# EAGLE board ProMicro Keyer - V1_1 (EAGLE 9.5.2)
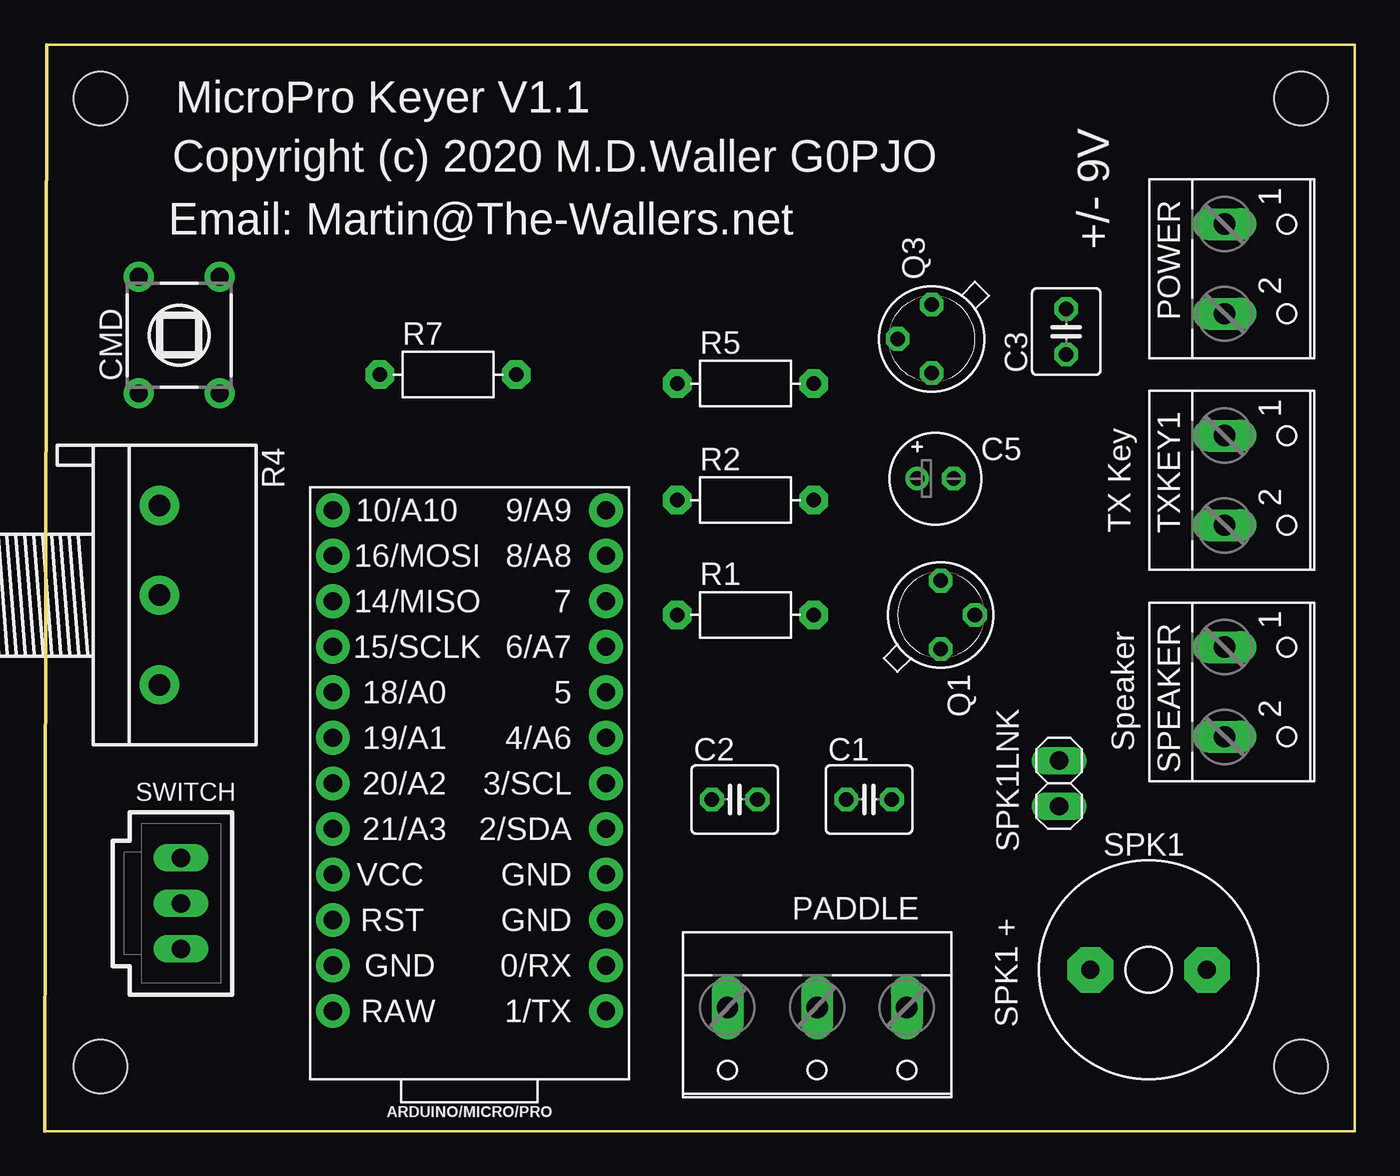
[diagram p0: board, top side]
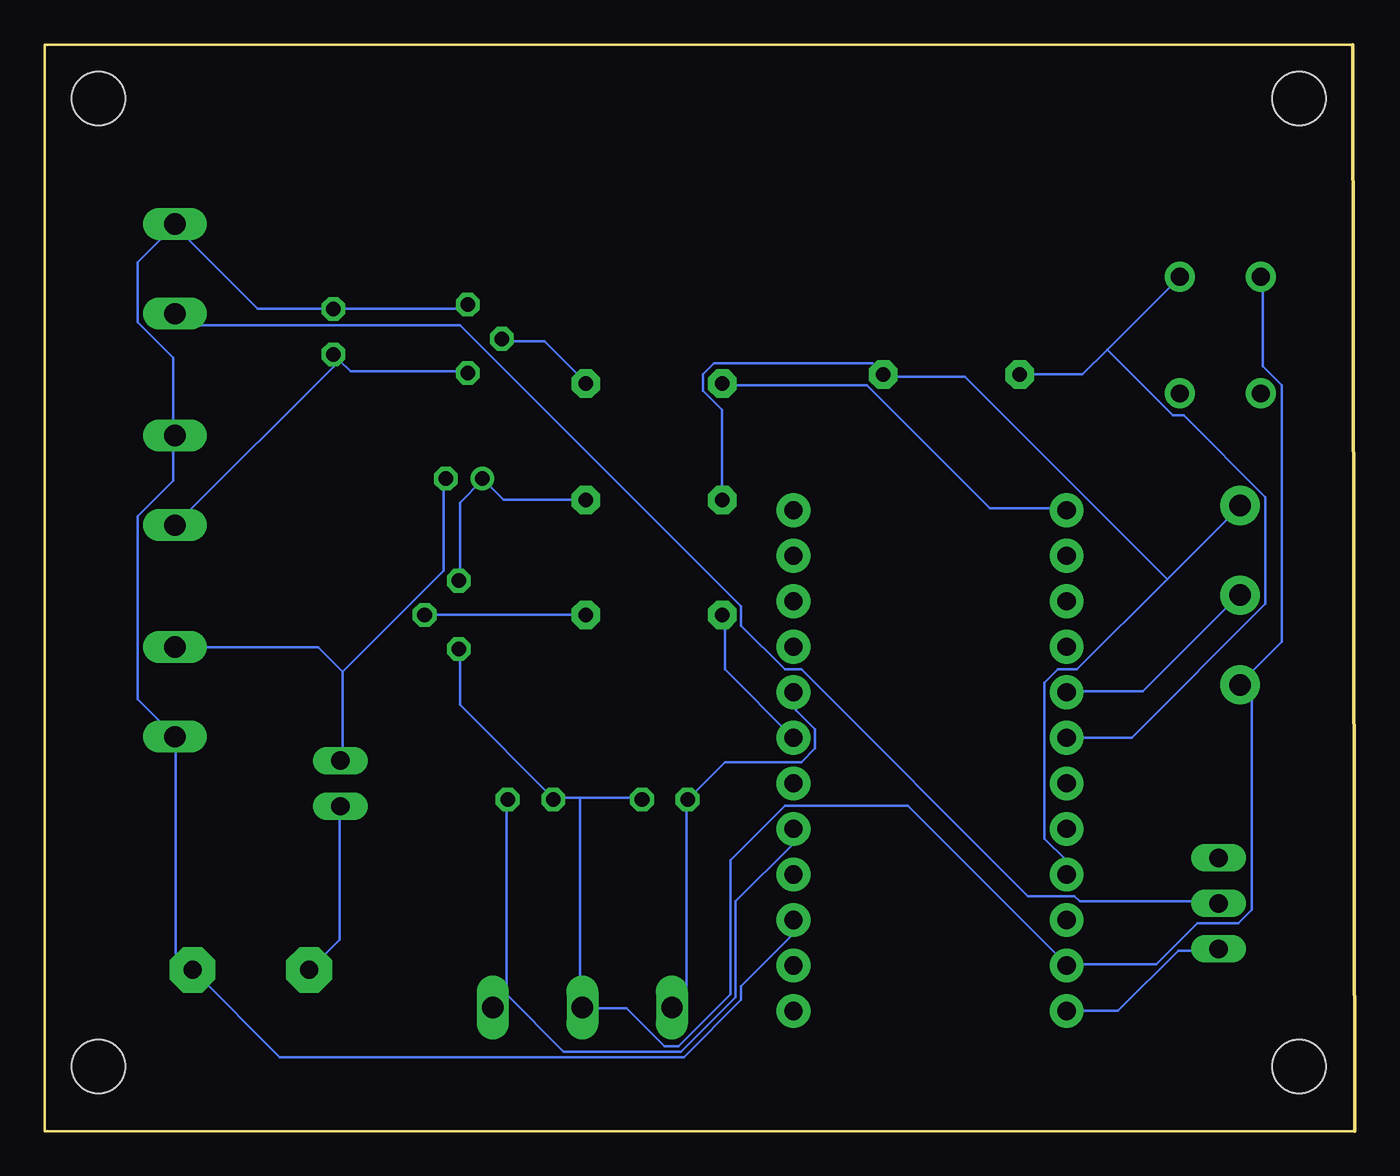
[diagram p1: board, bottom side, seen from below]

Size 73.1 x 60.6 mm. Coordinates in mm from the lower left corner, seen from the top.
Outline: 0.1,60.6 0,0 73.1,0 73.1,60.6 0.1,60.6
Copper layers (1*16): Top 0.035mm / dielectric 1.5mm / Bottom 0.035mm
Design rules "default": minimum track width 6mil, minimum drill 0.35mm, track to track 6mil, track to pad 6mil, pad to pad 6mil, via to via 6mil, smd to smd 6mil, copper to edge 40mil, drill to drill 6mil, minimum pad ring 10mil, minimum via ring 8mil, stop-mask expansion 4mil, vias tented up to drill 0mil, thermal gap 10mil
Holes 3 mm at 3.1,3.6 70.1,3.6 70.1,57.6 3.1,57.6

## Footprints (pad centres in the part's own frame; a part is rotated, then mirrored left to right if it is on the bottom)
SPARKFUN_PRO_MICRO = drill 1.016 pad 1.88: 1 -7.62,12.7; 2 -7.62,10.16; 3 -7.62,7.62; 4 -7.62,5.08; 5 -7.62,2.54; 6 -7.62,0; 7 -7.62,-2.54; 8 -7.62,-5.08; 9 -7.62,-7.62; 10 -7.62,-10.16; 11 -7.62,-12.7; 12 -7.62,-15.24; 13 7.62,-15.24; 14 7.62,-12.7; 15 7.62,-10.16; 16 7.62,-7.62; 17 7.62,-5.08; 18 7.62,-2.54; 19 7.62,0; 20 7.62,2.54; 21 7.62,5.08; 22 7.62,7.62; 23 7.62,10.16; VCC 7.62,12.7
C025-040X050 = drill 0.813 octagon: 1 -1.27,0; 2 1.27,0
E2-5 = drill 0.813 pad 1.27: + -1.016,0 | drill 0.813 pad 1.27 octagon: - 1.016,0
TL1105T = drill 1 pad 1.676: 1 -2.25,3.25; 2 2.25,3.25; 3 -2.25,-3.25; 4 2.25,-3.25
W237-103 = drill 1.194 long: 1 -5,-1.29; 2 0,-1.29; 3 5,-1.29
W237-102 = drill 1.194 long: 1 -2.5,-1.27; 2 2.5,-1.27
TO18- = drill 0.813 octagon: 1 1.905,0; 2 0,1.905; 3 -1.905,0
R-7,5 = drill 0.813 pad 1.6 octagon: 1 -3.81,0; 2 3.81,0
3RP/1610N = drill 1.2 pad 2.184: 1 -5,0; 2 0,0; 3 5,0
AL60P = drill 1.016 pad 2.54 octagon: 1 -3.251,0; 2 3.251,0
1X02 = drill 1.016 long: 1 -1.27,0; 2 1.27,0
70543-03 = drill 1.016 long: 1 -2.54,0; 2 0,0; 3 2.54,0

## Placement (x,y rotation side)
ARDUINO/MICRO/PRO  [SPARKFUN_PRO_MICRO]  23.7,19.4 180 top
C1  0.01  [C025-040X050]  46,18.5 0 top
C2  0.01  [C025-040X050]  38.5,18.5 0 top
C3  0.01  [C025-040X050]  57,44.6 90 top
C5  100  [E2-5]  49.7,36.4 0 top
CMD  [TL1105T]  7.5,44.4 0 top
PADDLE  PADDLE  [W237-103]  43.1,5.6 180 top
POWER  [W237-102]  67.1,48.1 270 top
Q1  2N2222  [TO18-]  50,28.8 270 top
Q3  2N2222  [TO18-]  49.5,44.2 90 top
R1  1K  [R-7,5]  39.1,28.8 0 top
R2  1K  [R-7,5]  39.1,35.2 0 top
R4  10K  [3RP/1610N]  6.4,29.9 270 top
R5  1K  [R-7,5]  39.1,41.7 0 top
R7  10K  [R-7,5]  22.5,42.2 0 top
SPEAKER  [W237-102]  67.1,24.5 270 top
SPK1  [AL60P]  61.6,9 0 top
SPK1LNK  [1X02]  56.6,19.4 90 top
SWITCH  [70543-03]  7.6,12.7 270 top
TXKEY1  [W237-102]  67.1,36.3 270 top

## Library data of the parts
ARDUINO/MICRO/PRO = ArduinoLibrary
C1-C3 = ref-packages
C5 = rcl
CMD = switch
PADDLE POWER SPEAKER TXKEY1 = con-wago-500
Q1 Q3 = transistor
R1 R2 R5 R7 = discrete
R4 = pot
SPK1 = buzzer
SPK1LNK = pinhead
SWITCH = con-molex

## Nets
S$1: C5.- SPEAKER.1 SPK1LNK.2
S$3: ARDUINO/MICRO/PRO.11
S$5: ARDUINO/MICRO/PRO.VCC SWITCH.3
S$6: ARDUINO/MICRO/PRO.3 C3.2 POWER.1 Q3.1 SPEAKER.2 SPK1.2 TXKEY1.1
S$7: ARDUINO/MICRO/PRO.17 R4.2
S$9: C5.+ Q1.3 R2.2
S$10: ARDUINO/MICRO/PRO.18 CMD.2 R7.1
S$12: ARDUINO/MICRO/PRO.23 C1.1 C2.2 CMD.1 PADDLE.2 Q1.1 R4.3
S$14: Q1.2 R1.2
S$15: ARDUINO/MICRO/PRO.7 R1.1
S$16: ARDUINO/MICRO/PRO.12
S$17: ARDUINO/MICRO/PRO.21 R2.1 R4.1 R7.2
S$18: ARDUINO/MICRO/PRO.5 C1.2 PADDLE.1
S$19: Q3.2 R5.2
S$20: ARDUINO/MICRO/PRO.13 R5.1
S$21: C3.1 Q3.3 TXKEY1.2
S$23: ARDUINO/MICRO/PRO.2
S$24: ARDUINO/MICRO/PRO.1
S$25: SPK1.1 SPK1LNK.1
S$26: ARDUINO/MICRO/PRO.8 C2.1 PADDLE.3
S$27: POWER.2 SWITCH.2

## Tracks (layer width: path | path; a pad name or v marks a point on that pad's centre or on a via)
S$1
  Bottom 0.152: 56.49,25.61 50.85,31.25 50.85,36.28 C5.- | 56.49,25.61 56.49,20.74 SPK1LNK.2 | 56.49,25.61 57.86,26.98 65.78,26.98 SPEAKER.1
S$5
  Bottom 0.152: SWITCH.3 7.72,10.07 9.85,10.07 13.21,6.71 15.95,6.71 ARDUINO/MICRO/PRO.VCC
S$6
  Bottom 0.152: Q3.1 49.63,46.03 49.78,45.88 56.95,45.88 C3.2 57.1,45.88 61.21,45.88 65.78,50.45 POWER.1 65.94,50.45 67.92,48.47 67.92,45.12 65.94,43.14 65.94,38.87 TXKEY1.1 65.94,38.72 65.94,36.28 67.92,34.3 67.92,24.09 65.94,22.11 SPEAKER.2 65.78,21.96 65.78,9.92 64.87,9 SPK1.2 64.72,8.85 59.99,4.12 37.44,4.12 34.24,7.32 34.24,8.09 31.34,10.98 31.34,11.74 ARDUINO/MICRO/PRO.3
S$7
  Bottom 0.152: ARDUINO/MICRO/PRO.17 15.95,24.55 11.83,24.55 6.5,29.88 R4.2
S$9
  Bottom 0.152: Q1.3 49.94,30.79 49.94,35.06 48.72,36.28 C5.+ 48.56,36.28 47.5,35.21 42.92,35.21 R2.2
S$10
  Bottom 0.152: 13.82,43.6 9.85,47.56 CMD.2 | 13.82,43.6 15.19,42.22 18.54,42.22 R7.1 | 13.82,43.6 10.16,39.94 9.55,39.94 4.98,35.37 4.98,29.42 12.44,21.96 15.95,21.96 ARDUINO/MICRO/PRO.18
S$12
  Bottom 0.152: 43.23,18.6 44.6,18.6 C1.1 44.75,18.6 49.94,23.78 49.94,26.83 Q1.1 | 43.23,18.6 39.88,18.6 C2.2 | 43.23,18.6 43.23,7.02 PADDLE.2 43.08,6.87 40.64,6.87 38.51,4.73 37.74,4.73 34.85,7.63 34.85,15.1 31.8,18.14 24.94,18.14 16.1,9.31 ARDUINO/MICRO/PRO.23 15.95,9.31 11.07,9.31 8.79,11.59 6.5,11.59 5.74,12.35 5.74,24.24 6.35,24.85 R4.3 6.35,25 4.06,27.29 4.06,41.61 5.13,42.68 5.13,47.56 CMD.1
S$14
  Bottom 0.152: Q1.2 51.76,28.81 42.92,28.81 R1.2
S$15
  Bottom 0.152: R1.1 35.15,28.66 35.15,25.77 31.34,21.96 ARDUINO/MICRO/PRO.7
S$17
  Bottom 0.152: R2.1 35.3,35.21 35.3,40.24 36.37,41.31 36.37,42.22 35.76,42.83 26.92,42.83 26.31,42.22 R7.2 26.16,42.07 21.74,42.07 10.46,30.79 | 10.46,30.79 6.5,34.76 R4.1 | 10.46,30.79 15.49,25.77 16.56,25.77 17.32,25 17.32,16.32 16.1,15.1 16.1,14.33 ARDUINO/MICRO/PRO.21
S$18
  Bottom 0.152: 47.34,7.63 47.34,18.45 C1.2 | 47.34,7.63 47.95,7.02 PADDLE.1 47.34,7.63 | 47.34,7.63 44.14,4.43 37.59,4.43 34.54,7.48 34.54,12.81 31.34,16.01 31.34,16.77 ARDUINO/MICRO/PRO.5
S$19
  Bottom 0.152: Q3.2 47.5,44.05 45.21,44.05 42.92,41.77 R5.2
S$20
  Bottom 0.152: R5.1 35.15,41.61 27.23,41.61 20.37,34.76 16.1,34.76 ARDUINO/MICRO/PRO.13
S$21
  Bottom 0.152: 56.64,42.99 56.95,43.29 C3.1 56.64,42.99 | 56.64,42.99 56.03,42.38 49.63,42.38 Q3.3 | 56.64,42.99 65.78,33.84 TXKEY1.2
S$25
  Bottom 0.152: SPK1LNK.1 56.64,17.99 56.64,10.68 58.32,9 SPK1.1
S$26
  Bottom 0.152: PADDLE.3 38.05,7.02 37.29,7.78 37.29,18.45 C2.1 37.13,18.6 35.15,20.58 30.89,20.58 30.12,21.35 30.12,22.41 31.19,23.48 31.19,24.39 ARDUINO/MICRO/PRO.8
S$27
  Bottom 0.152: SWITCH.2 7.72,12.81 15.34,12.81 15.64,13.12 18.24,13.12 30.89,25.77 31.8,25.77 34.24,28.2 34.24,29.27 49.94,44.97 65.17,44.97 65.78,45.58 POWER.2

## Text on the board
tPlace: MicroPro Keyer V1.1 | Copyright (c) 2020 M.D.Waller G0PJO | Email: Martin@The-Wallers.net
tNames: +/- 9V | TX Key | Speaker | SPK1 +